# Allegro board pcb11.brd
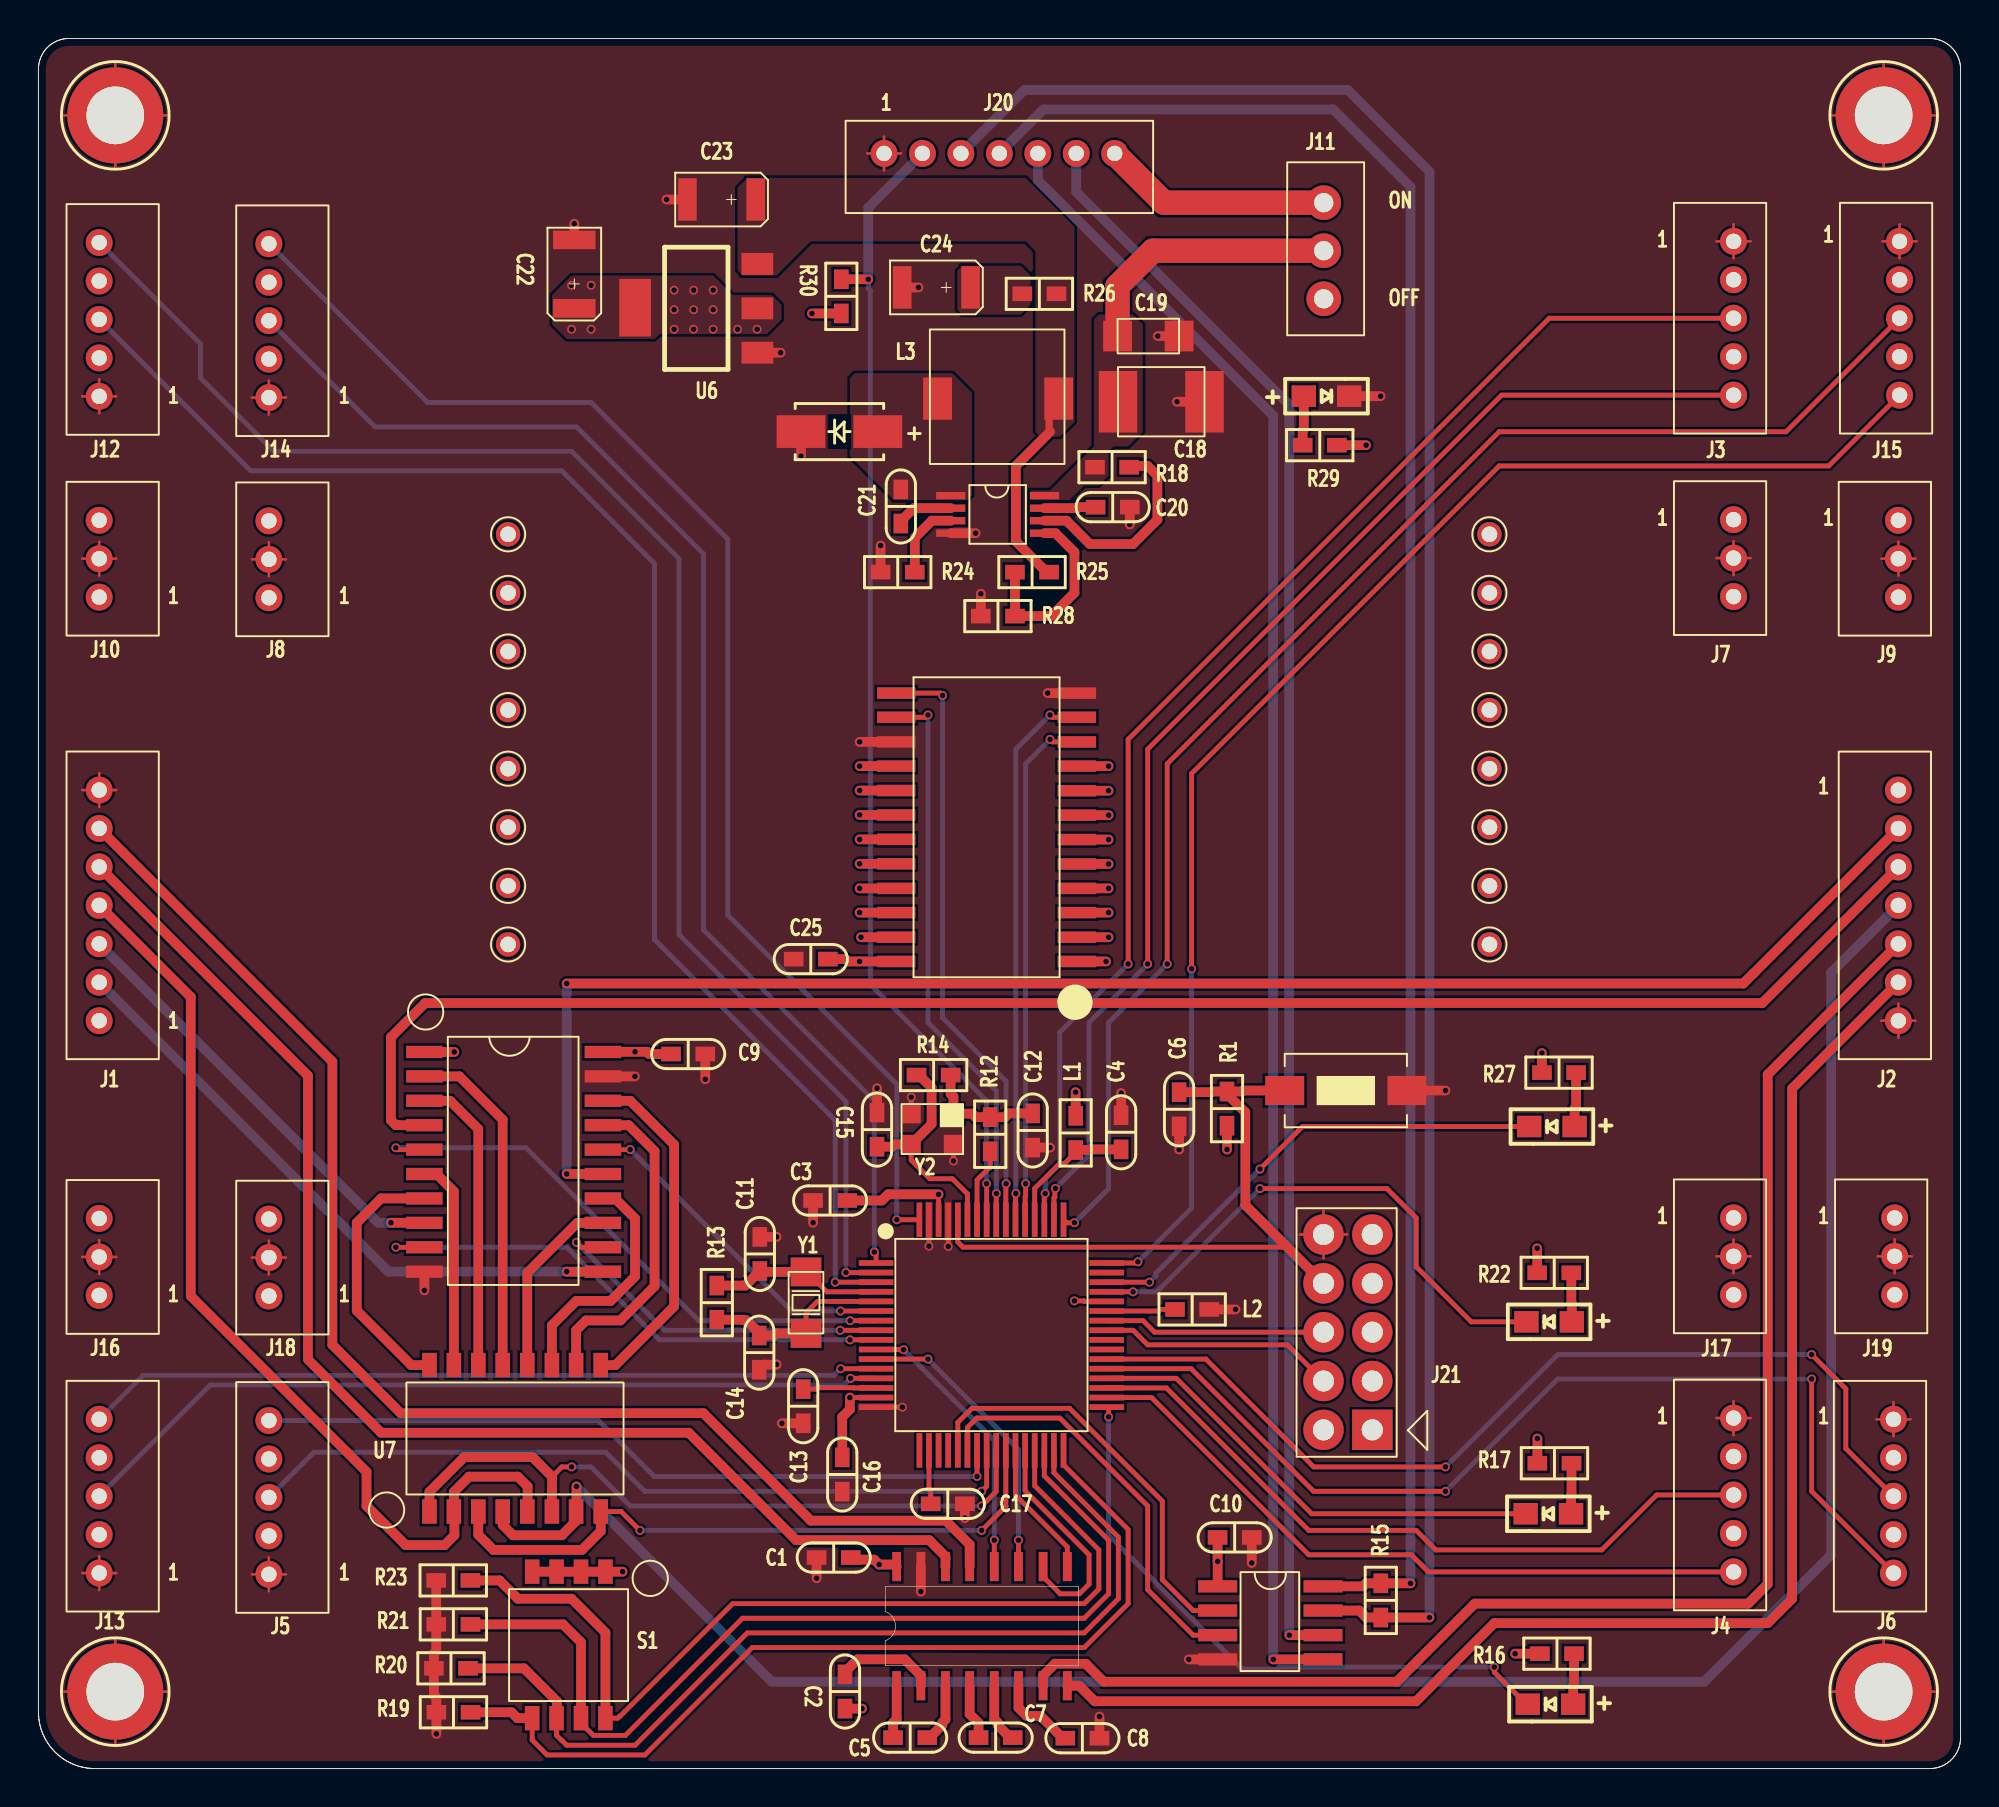
[diagram p0: board, top side]
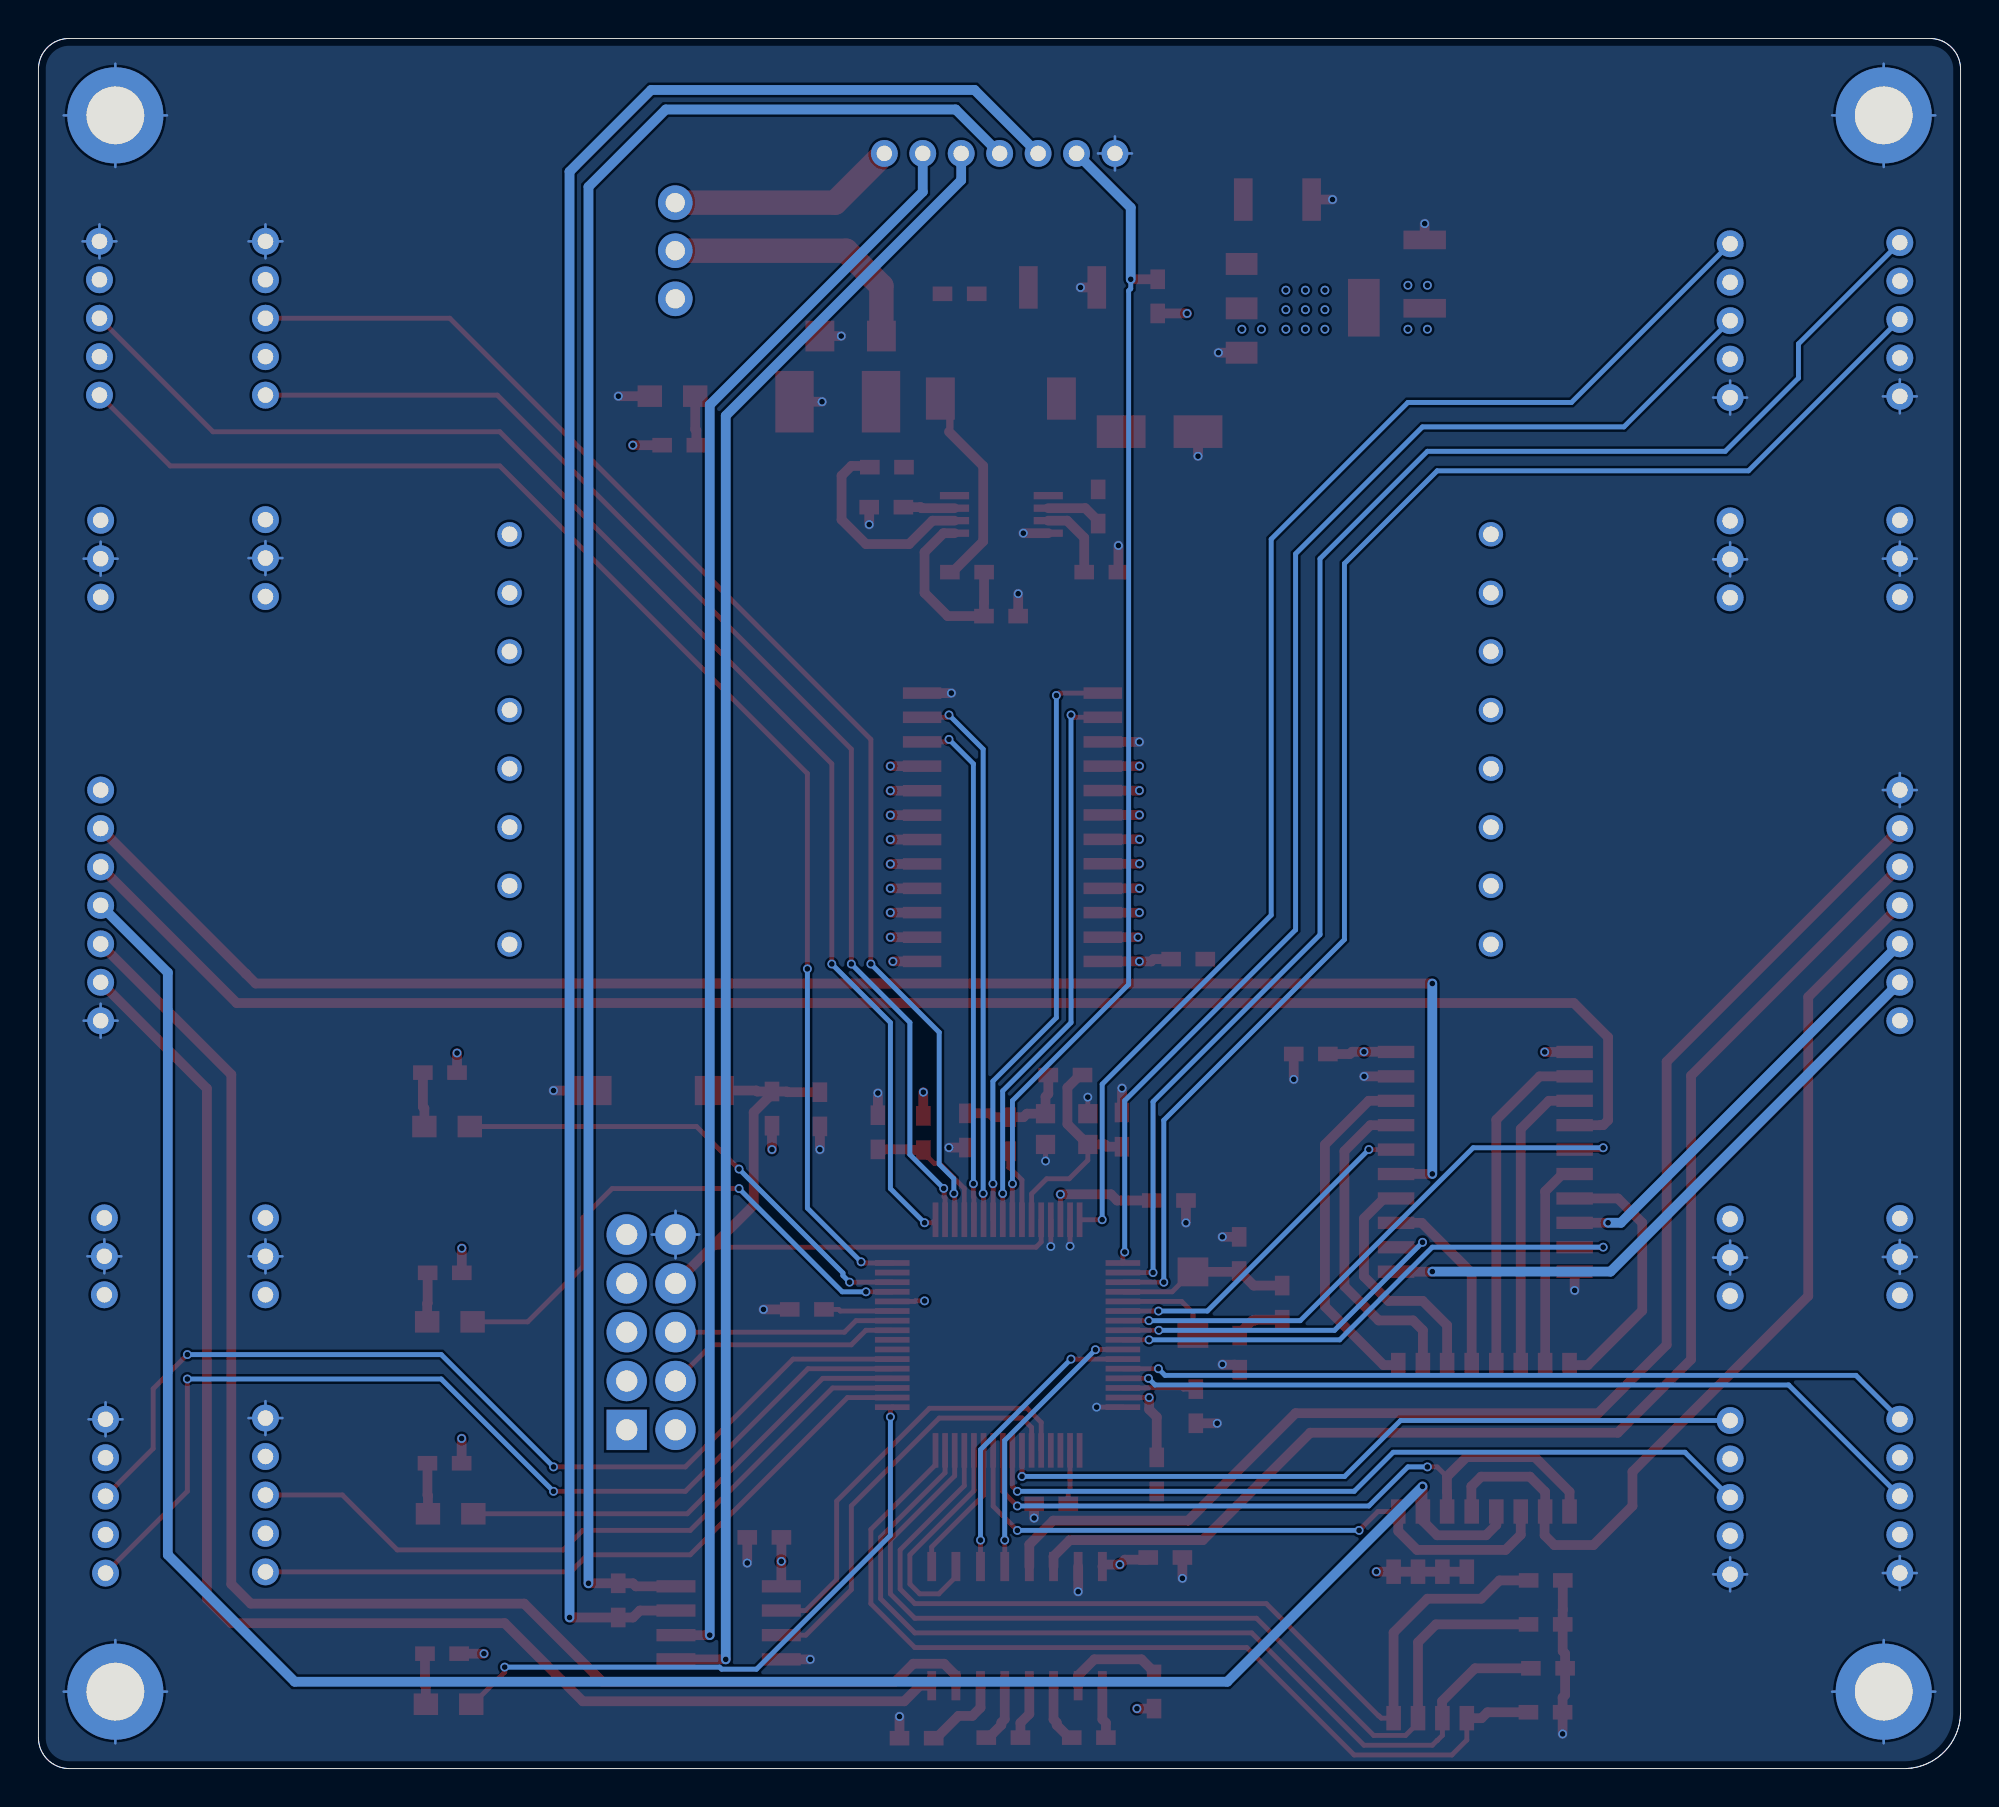
[diagram p1: board, bottom side, seen from below]

Outline 100 x 90 mm; copper layers: TOP, GND, PWR, BOTTOM. Coordinates in mm from the lower left corner of the outline.
Outline path: 0,88.4 arc(0.44,89.51) 1.53,90 ; 0,88.4 arc(0.44,89.51) 1.53,90 ; 0,88.4 0,2.88 ; 1.53,90 98.4,90 ; 0,2.88 arc(0.84,0.88) 2.82,0 ; 0,2.88 arc(0.84,0.88) 2.82,0 ; 98.4,90 arc(99.51,89.56) 100,88.47 ; 98.4,90 arc(99.51,89.56) 100,88.47 ; 2.82,0 98.43,0 ; 100,88.47 100,1.6 ; 98.43,0 arc(99.54,0.48) 100,1.6 ; 98.43,0 arc(99.54,0.48) 100,1.6

## Placement (name value [footprint] x y rotation side)
C1  0.1uF  [C0603]  41.37 10.98 180 top
C2  0.1uF  [C0603]  41.96 4.01 270 top
C3  0.1uF  [C0603]  41.19 29.55 0 top
C4  0.1uF  [C0603]  56.33 33.1 270 top
C5  0.1uF  [C0603]  45.35 1.61 0 top
C6  10uF  [C0603]  59.34 34.3 90 top
C7  0.1uF  [C0603]  49.8 1.61 0 top
C8  0.1uF  [C0603]  54.31 1.58 180 top
C9  0.1uF  [C0603]  33.8 37.17 0 top
C10  0.1uF  [C0603]  62.24 12.02 0 top
C11  20p  [C0603]  37.53 26.77 270 top
C12  20p  [C0603]  51.72 33.19 90 top
C13  1uF  [C0603]  39.79 18.85 90 top
C14  20p  [C0603]  37.5 21.64 90 top
C15  20p  [C0603]  43.63 33.24 270 top
C16  0.1uF  [C0603]  41.82 15.3 90 top
C17  1uF  [C0603]  47.31 13.77 180 top
C18  1uF/100V C4532X7R2A105M  [C4532]  56.16 71.1 0 top
C19  0.1uF/100V C3216X7R2A104KT  [C3216]  56.14 74.52 0 top
C20  0.1uF  [C0603]  55.89 65.62 0 top
C21  0.01uF  [C0603]  44.87 65.65 90 top
C22  47uF/6.3V  [C3528]  27.88 77.74 270 top
C23  10uF/16V  [C3528]  35.54 81.62 0 top
C24  10uF/16V  [C3528]  46.72 77.05 0 top
C25  0.1uF  [C0603]  40.18 42.11 180 top
D1  B260A  [SMA]  41.67 69.55 180 top
DS1  LED  [LED0805]  78.66 3.35 180 top
DS2  LED  [LED0805]  78.55 13.25 180 top
DS3  LED  [LED0805]  78.6 23.24 180 top
DS4  LED  [LED0805]  78.74 33.4 180 top
DS5  LED  [LED0805]  67.01 71.39 0 top
H4  MOUNT_HOLE  [HOLE197-118]  96 4 0 top
H5  MOUNT_HOLE  [HOLE197-118]  4 4 0 top
J1  CON7  [PH20_7]  3.16 38.9 90 top
J2  CON7  [PH20_7]  96.76 50.9 270 top
J3  CON7  [PH20_5]  88.19 79.45 270 top
J4  CON7  [PH20_5]  88.19 18.23 270 top
J5  CON7  [PH20_5]  11.99 10.1 90 top
J6  CON7  [PH20_5]  96.51 18.17 270 top
J7  CON3  [PH20_3]  88.19 64.97 270 top
J8  CON3  [PH20_3]  11.99 60.9 90 top
J9  CON3  [PH20_3]  96.76 64.94 270 top
J10  CON3  [PH20_3]  3.16 60.94 90 top
J11  SW  [SW-3]  66.87 81.46 270 top
J12  CON7  [PH20_5]  3.16 71.38 90 top
J13  CON7  [PH20_5]  3.16 10.17 90 top
J14  CON7  [PH20_5]  11.99 71.32 90 top
J15  CON7  [PH20_5]  96.82 79.45 270 top
J16  CON3  [PH20_3]  3.16 24.62 90 top
J17  CON3  [PH20_3]  88.19 28.65 270 top
J18  CON3  [PH20_3]  11.99 24.58 90 top
J19  CON3  [PH20_3]  96.57 28.65 270 top
J20  CON7  [PH20_7]  43.99 84.02 0 top
J21  CONN PCB 5x2-S  [10PIN]  66.86 17.62 0 top
L1  FERRITE BEAD  [L0603]  53.96 33.07 270 top
L2  FERRITE BEAD  [L0603]  60.02 23.88 0 top
L3  100uH(SLF7045T-101MR50-PF)  [L7X7]  46.78 71.26 0 top
R1  10K  [R0603]  61.84 34.33 270 top
R12  33  [R0603]  49.52 33 90 top
R13  10M  [R0603]  35.29 24.24 90 top
R14  1M  [R0603]  46.57 36.08 0 top
R15  120 NC  [R0603]  69.84 8.75 90 top
R16  1K  [R0603]  79 5.98 180 top
R17  1K  [R0603]  78.87 15.88 180 top
R18  200K  [R0603]  55.86 67.7 180 top
R19  1K  [R0603]  21.59 2.93 180 top
R20  1K  [R0603]  21.46 5.21 180 top
R21  1K  [R0603]  21.59 7.5 180 top
R22  1K  [R0603]  78.86 25.79 180 top
R23  1K  [R0603]  21.58 9.79 180 top
R24  100K  [R0603]  44.7 62.24 0 top
R25  1.62K  [R0603]  51.69 62.24 0 top
R26  1  [R0603]  52.08 76.72 0 top
R27  1K  [R0603]  79.11 36.2 180 top
R28  1K  [R0603]  49.92 59.95 0 top
R29  1K  [R0603]  66.66 68.84 0 top
R30  1K  [R0603]  41.77 76.58 270 top
REF DES1  MOUNT_HOLE  [HOLE197-118]  4 86 0 top
REF DES2  MOUNT_HOLE  [HOLE197-118]  96 86 0 top
S1  SW_DIP-4  [SW4]  31.42 6.43 0 top
SW1  PUSH BOTTOM  [KEY_SMD]  68.02 35.27 180 top
TP1  TP  [TP1]  75.49 58.11 0 top
TP2  TP  [TP1]  24.43 58.11 0 top
TP3  TP  [TP1]  75.49 55.06 0 top
TP4  TP  [TP1]  24.43 55.06 0 top
TP5  TP  [TP1]  24.43 52.01 0 top
TP6  TP  [TP1]  24.43 45.92 0 top
TP7  TP  [TP1]  75.49 45.92 0 top
TP8  TP  [TP1]  75.49 52.01 0 top
TP9  TP  [TP1]  75.49 64.21 0 top
TP10  TP  [TP1]  24.43 42.87 0 top
TP11  TP  [TP1]  75.49 42.87 0 top
TP12  TP  [TP1]  75.49 48.97 0 top
TP13  TP  [TP1]  24.43 64.21 0 top
TP14  TP  [TP1]  24.43 61.16 0 top
TP15  TP  [TP1]  24.43 48.97 0 top
TP16  TP  [TP1]  75.49 61.16 0 top
U1  MAX232AESE  [SO16]  49.09 7.41 90 top
U2  74HC245D  [SOIC20]  20.33 37.28 0 top
U3  NUC140RE3CN  [LQFP64]  49.58 22.55 0 top
U4  MAX490ESA  [SOIC8]  64.09 7.58 0 top
U5  LM5007MM  [MSOP-8]  47.46 66.22 0 top
U6  LM1117IMPX-5.0  [SOT_223_G]  34.22 75.96 90 top
U7  SWICH8  [SW8]  26.07 17.18 0 top
U8  CD74HCT4067M  [SO24]  49.33 48.97 180 top
Y1  32.768KHz  [Y3215]  39.93 25.84 270 top
Y2  12MHz  [CRYSTAL3225]  47.6 34.07 180 top

## Library data of the parts
C1 C2 C5 C7-C10 C18-C25 = CAP NP
C3 C4 C6 C11-C17 = CAP-C_0
D1 = ZHCS750/SOT_0
DS1-DS5 = LED-0603-LTST-C190GKT_1: Tolerance: #TOL; User Part Number: HAMP
H4 H5 REF DES1 REF DES2 = MOUNT_HOLE
J1 J2 J20 = CON7
J3-J6 J12-J15 = CON5_3
J7-J10 J16-J19 = CON3
J11 = CON3_0
J21 = CONN PCB 5x2-S
L1 L2 = INDUCTOR_0
L3 = INDUCTOR
R1 R12-R17 R19-R23 R27 R29 R30 = R_0
R18 R24-R26 R28 = R
S1 = SW_DIP4_0
SW1 = SW PUSHBUTTON
TP1-TP16 = TP
U1 = MAX232I/SO
U2 = 74HCT245_2: User Part Number: ***; Tolerance: ***
U3 = NCU120_LQFP_1
U4 = MAX490ESA: Tolerance: ***; User Part Number: ***
U5 = DD_0
U6 = LM1117_0
U7 = SWICH8
U8 = CD74HCT4067M
Y1 = CRYSTAL
Y2 = Crystal/SMD

## Footprints (pads in the part's own frame, mm; a bottom-side part is the same pattern mirrored in y, then rotated)
10PIN
  rect 2.101x2.101 hole 1.1: 1(2.54,0)
  round 2.101 hole 1.1: 2(0,0) 3(2.54,2.54) 4(0,2.54) 5(2.54,5.08) 6(0,5.08) 7(2.54,7.62) 8(0,7.62) 9(2.54,10.16) 10(0,10.16)
C0603
  rect 1.021x0.759 smd: 1(-0.889,0) 2(0.889,0)
C3216
  rect 1.501x1.6 smd: 1(0,0) 2(3.2,0)
C3528
  rect 0.97x2.21 smd: 1(1.778,0) 2(-1.778,0)
C4532
  rect 1.999x3.2 smd: 1(0,0) 2(4.501,0)
CRYSTAL3225
  rect 1.001x1.001 smd: 1(0,0) 2(2.2,0) 3(2.2,1.6) 4(0,1.6)
HOLE197-118
  round 5.001 hole 3: 1(0,0)
KEY_SMD
  rect 2.029x1.519 smd: 1(-3.18,0) 2(3.18,0)
L7X7
  rect 1.501x2.2 smd: 1(0,0) 2(6.299,0)
L0603
  rect 1.021x0.759 smd: 1(-0.889,0) 2(0.889,0)
LED0805
  rect 1.27x1.12 smd: 1(-1.181,0) 2(1.181,0)
LQFP64
  rect 1.801x0.3 smd: 1(-5.999,3.749) 2(-5.999,3.251) 3(-5.999,2.751) 4(-5.999,2.25) 5(-5.999,1.75) 6(-5.999,1.25) 7(-5.999,0.749) 8(-5.999,0.249) 9(-5.999,-0.249) 10(-5.999,-0.749) 11(-5.999,-1.25) 12(-5.999,-1.75) 13(-5.999,-2.25) 14(-5.999,-2.751) 15(-5.999,-3.251) 16(-5.999,-3.749) 33(5.999,-3.749) 34(5.999,-3.251) 35(5.999,-2.751) 36(5.999,-2.25) 37(5.999,-1.75) 38(5.999,-1.25) 39(5.999,-0.749) 40(5.999,-0.249) 41(5.999,0.249) 42(5.999,0.749) 43(5.999,1.25) 44(5.999,1.75) 45(5.999,2.25) 46(5.999,2.751) 47(5.999,3.251) 48(5.999,3.749)
  rect 0.3x1.801 smd: 17(-3.749,-5.999) 18(-3.251,-5.999) 19(-2.751,-5.999) 20(-2.25,-5.999) 21(-1.75,-5.999) 22(-1.25,-5.999) 23(-0.749,-5.999) 24(-0.249,-5.999) 25(0.249,-5.999) 26(0.749,-5.999) 27(1.25,-5.999) 28(1.75,-5.999) 29(2.25,-5.999) 30(2.751,-5.999) 31(3.251,-5.999) 32(3.749,-5.999) 49(3.749,5.999) 50(3.251,5.999) 51(2.751,5.999) 52(2.25,5.999) 53(1.75,5.999) 54(1.25,5.999) 55(0.749,5.999) 56(0.249,5.999) 57(-0.249,5.999) 58(-0.749,5.999) 59(-1.25,5.999) 60(-1.75,5.999) 61(-2.25,5.999) 62(-2.751,5.999) 63(-3.251,5.999) 64(-3.749,5.999)
MSOP-8
  rect 1.519x0.381 smd: 1(0,0) 2(0,-0.65) 3(0,-1.3) 4(0,-1.951) 5(4.879,-1.951) 6(4.879,-1.3) 7(4.879,-0.65) 8(4.879,0)
PH20_3
  round 1.4 hole 0.8: 1(0,0) 2(1.999,0) 3(4,0)
PH20_5
  round 1.4 hole 0.8: 1(0,0) 2(1.999,0) 3(4,0) 4(5.999,0) 5(8.001,0)
PH20_7
  round 1.4 hole 0.8: 1(0,0) 2(1.999,0) 3(4,0) 4(5.999,0) 5(8.001,0) 6(10,0) 7(11.999,0)
R0603
  rect 1.021x0.759 smd: 1(-0.889,0) 2(0.889,0)
SMA
  rect 2.54x1.699 smd: 1(1.999,0) 2(-1.999,0)
SO16
  rect 1.519x0.46 smd: 1(-3.099,4.44) 2(-3.099,3.18) 3(-3.099,1.9) 4(-3.099,0.64) 5(-3.099,-0.64) 6(-3.099,-1.9) 7(-3.099,-3.18) 8(-3.099,-4.44) 9(3.099,-4.44) 10(3.099,-3.18) 11(3.099,-1.9) 12(3.099,-0.64) 13(3.099,0.64) 14(3.099,1.9) 15(3.099,3.18) 16(3.099,4.44)
SO24
  rect 1.999x0.599 smd: 1(-4.699,6.98) 2(-4.699,5.72) 3(-4.699,4.44) 4(-4.699,3.18) 5(-4.699,1.91) 6(-4.699,0.64) 7(-4.699,-0.63) 8(-4.699,-1.9) 9(-4.699,-3.18) 10(-4.699,-4.44) 11(-4.699,-5.72) 12(-4.699,-6.98) 13(4.699,-6.98) 14(4.699,-5.72) 15(4.699,-4.44) 16(4.699,-3.18) 17(4.699,-1.91) 18(4.699,-0.64) 19(4.699,0.63) 20(4.699,1.9) 21(4.699,3.18) 22(4.699,4.44) 23(4.699,5.72) 24(4.699,6.98)
SOIC8
  rect 2.029x0.64 smd: 1(-2.741,1.9) 2(-2.741,0.64) 3(-2.741,-0.64) 4(-2.741,-1.9) 5(2.741,-1.9) 6(2.741,-0.64) 7(2.741,0.64) 8(2.741,1.9)
SOIC20
  rect 1.9x0.64 smd: 1(-0.249,0) 2(-0.249,-1.27) 3(-0.249,-2.54) 4(-0.249,-3.81) 5(-0.249,-5.08) 6(-0.249,-6.35) 7(-0.249,-7.62) 8(-0.249,-8.89) 9(-0.249,-10.16) 10(-0.249,-11.43) 11(9.04,-11.43) 12(9.04,-10.16) 13(9.04,-8.89) 14(9.04,-7.62) 15(9.04,-6.35) 16(9.04,-5.08) 17(9.04,-3.81) 18(9.04,-2.54) 19(9.04,-1.27) 20(9.04,0)
SOT_223_G
  rect 1.14x1.651 smd: 1(-2.309,-3.18) 2(0,-3.18) 3(2.309,-3.18)
  rect 3x1.651 smd: 4(0.03,3.18)
SW4
  rect 0.759x1.27 smd: 1(-5.73,-3.81) 2(-4.46,-3.81) 3(-3.19,-3.81) 4(-1.92,-3.81) 5(-1.92,3.81) 6(-3.19,3.81) 7(-4.46,3.81) 8(-5.73,3.81)
SW8
  rect 0.759x1.27 smd: 1(-5.73,-3.81) 2(-4.46,-3.81) 3(-3.19,-3.81) 4(-1.92,-3.81) 5(-0.64,-3.81) 6(0.64,-3.81) 7(1.9,-3.81) 8(3.18,-3.81) 9(3.18,3.81) 10(1.9,3.81) 11(0.64,3.81) 12(-0.64,3.81) 13(-1.92,3.81) 14(-3.19,3.81) 15(-4.46,3.81) 16(-5.73,3.81)
SW-3
  round 1.801 hole 1.001: 1(0,0) 2(2.499,0) 3(5.001,0)
TP1
  round 1.27 hole 0.813: 1(0,0)
Y3215
  rect 1.501x1.6 smd: 1(0,0) 2(3.2,0)

## Nets
DGND: C1.2 C3.1 C4.1 C6.1 C8.1 C9.2 C10.2 C11.1 C12.1 C13.1 C14.1 C15.1 C16.1 C17.1 C18.2 C19.2 C20.2 C22.2 C23.2 C24.2 C25.2 D1.1 DS5.2(CATHODE) H4.1 H5.1 J1.7 J2.7 J3.1 J4.1 J5.1 J6.1 J7.2 J8.2 J9.2 J10.2 J12.1 J13.1 J14.1 J15.1 J16.2 J17.2 J18.2 J19.2 J20.1 J21.10 L2.2 R19.2 R20.2 R21.2 R23.2 R24.1 R28.1 REF DES1.1 REF DES2.1 SW1.1 U1.15(GND) U2.10(GND) U2.19(O\E\) U3.16(VSS1) U3.61(VSS2) U3.63(PVSS) U4.4 U5.4(RTN) U6.1(GND/ADJ) U8.12(GND) U8.15(\\E) Y2.2 Y2.4
DVCC5: C1.1 C2.2 C3.2 C9.1 C10.1 C16.2 C22.1 C25.1 J1.1 J2.1 J3.2 J4.2 J5.2 J6.2 J7.3 J8.3 J9.3 J10.3 J12.2 J13.2 J14.2 J15.2 J16.3 J17.3 J18.3 J19.3 J21.2(6) L1.1 R1.2 R16.2 R17.2 R22.2 R27.2 R29.2 R30.2 S1.5(B4) S1.6(B3) S1.7(B2) S1.8(B1) U1.16(VCC) U2.1(DIR) U2.20(VCC) U3.15(VDD1) U3.62(VDD2) U4.1(VCC) U6.2(OUT1) U6.4(OUT2) U8.24(VCC)
ADC: U3.44(PA.0/ADC0) U8.1(COM)
ADC0: J7.1 TP1.1 U8.7(I2)
ADC1: J8.1 TP2.1 U8.18(I13)
ADC2: J9.1 TP3.1 U8.6(I3)
ADC3: J10.1 TP4.1 U8.19(I12)
ADC4: J16.1 TP5.1 U8.20(I11)
ADC5: J17.1 TP7.1 U8.3(I6)
ADC6: J18.1 TP6.1 U8.22(I9)
ADC7: J19.1 TP8.1 U8.5(I4)
AN0: J3.4 TP9.1 U8.9(I0)
AN1: J4.4 TP11.1 U8.2(I7)
AN2: J5.4 TP10.1 U8.23(I8)
AN3: J6.4 TP12.1 U8.4(I5)
AN4: J12.4 TP14.1 U8.17(I14)
AN5: J13.4 TP15.1 U8.21(I10)
AN6: J14.4 TP13.1 U8.16(I15)
AN7: J15.4 TP16.1 U8.8(I1)
D12MI: C15.2 R14.1 U3.59(XT1_IN) Y2.3
D12MO: R12.1 U3.58(XT1_OUT)
DAVDD: C4.2 L1.2 U3.52(AVDD)
DAVSS: L2.1 U3.43(AVSS)
DC6.5V: C23.1 L3.2 R25.2 R26.2 U6.3(IN)
DC48V: C18.1 C19.1 J11.2 R18.2 U5.8(VIN)
DOOR_SW: J20.2 R30.1 U3.57(T0EX/INT1/PB.15)
DX32I: C14.2 R13.1 U3.5(X32I) Y1.2
DX32O: C11.2 R13.2 U3.4(X32O) Y1.1
GPIO0: U2.9(A7) U3.9(I2C0SDA/PA.8)
GPIO0_EXT: J1.2 U2.11(B7)
GPIO1: U2.12(B6) U3.8(I2C0SCL/PA.9)
GPIO1_EXT: J1.3 U2.8(A6)
GPIO2: U3.25(PD.6/CANRX0) U7.1 U7.6
GPIO2_EXT: J1.4 U7.2 U7.5
GPIO3: U2.5(A3) U3.7(NWR/I2C1SDA/PA.10)
GPIO3_EXT: J2.2 U2.15(B3)
GPIO4: U2.16(B2) U3.6(NRD/I2C1SCL/PA.11)
GPIO4_EXT: J2.3 U2.4(A2)
GPIO5: U3.26(PD.7/CANTX0) U7.3 U7.8
GPIO5_EXT: J2.4 U7.4 U7.7
ICECLK: J21.6(8) U3.42(ICE_CK)
ICEDAT: J21.4(7) U3.41(ICE_DAT)
ICERST: C6.2 J21.8(9) R1.1 SW1.2 U3.60(/RESET)
LED1: DS1.2(CATHODE) U3.33(PC.11/MOSI10)
LED2: DS2.2(CATHODE) U3.36(PC.8/SPISS10)
LED3: DS3.2(CATHODE) U3.45(PA.1/ADC1/AD12)
LED4: DS4.2(CATHODE) U3.46(PA.2/ADC2/AD11)
PW0: J3.5 U3.50(AD7/ADC6/PA.6)
PW1: J4.5 U3.34(PC.10/MISO10)
PW2: J5.5 U3.23(PB.2/RTS0/NWRL/T2EX)
PW3: J6.5 U3.37(PA.15/PWM3/I2SMCLK)
PW4: J12.5 U3.2(AD1/CPO1/PB.13)
PW5: J13.5 U3.12(ALE/RTS1/PB.6)
PW6: J14.5 U3.64(STADC/TM0/PB.8)
PW7: J15.5 U3.48(PA.4/ADC4/AD9)
RX0: J3.3 U3.51(AD6/ADC7PA.7)
RX1: J4.3 U3.35(PC.9/SPICLK1)
RX2: J5.3 U3.24(PB.3/CTS0/NWRH/T3EX)
RX3: J6.3 U3.38(PA.14/PWM2/AD15)
RX4: J12.3 U3.3(AD0/CLKO/CPO0/PB.12)
RX5: J13.3 U3.13(NCS/CTS1/PB.7)
RX6: J14.3 U3.1(SPISS31/INT0/PB.14)
RX7: J15.3 U3.49(AD8/ADC5/PA.5)
RXD0_485+: J20.4 R15.2 U4.8(A)
RXD0_485-: J20.3 R15.1 U4.7(B)
RXD0_TTL: U3.21(PB.0/RXD0) U4.2(RO)
RXD1_232: J1.6 U1.13(R1IN)
RXD1_TTL: U1.12(R\1\O\U\T\) U3.10(RXD1/PB.4)
RXD2_232: J2.6 U1.8(R2IN)
RXD2_TTL: U1.9(R\2\O\U\T\) U3.27(PD.14/RXD2)
S0: U3.53(AD5/CPN0/PC.7) U8.10(S0)
S1: U3.54(AD4/CPP0/PC.6) U8.11(S1)
S2: U3.56(AD2/CPP1/PC.14) U8.14(S2)
S3: U3.55(AD3/CPN1/PC.15) U8.13(S3)
SW1: R23.1 S1.4(A4) U3.29(PC.3/MOSI00/I2SDO)
SW2: R21.1 S1.3(A3) U3.30(PC.2/MISO00/I2SDI)
SW3: R20.1 S1.2(A2) U3.31(PC.1/SPICLK0/I2SBCLK)
SW4: R19.1 S1.1(A1) U3.32(PC.0/SPISS00/I2SLRCLK)
TXD0_485+: J20.5 U4.5(Y)
TXD0_485-: J20.6 U4.6(Z)
TXD0_TTL: U3.22(PB.1/TXD0) U4.3(DI)
TXD1_232: J1.5 U1.14(T\1\O\U\T\)
TXD1_TTL: U1.11(T1IN) U3.11(TXD1/PB.5)
TXD2_232: J2.5 U1.7(T\2\O\U\T\)
TXD2_TTL: U1.10(T2IN) U3.28(PD.15/TXD2)
N16792821: C12.2 R12.2 R14.2 Y2.1
N16829506: DS1.1(ANODE) R16.1
N16842654: C13.2 U3.14(LDO)
N16842979: C17.2 U3.18(VDD33)
N16844783: C2.1 U1.2(V+)
N16847896: DS2.1(ANODE) R17.1
N16848060: DS3.1(ANODE) R22.1
N16848148: DS4.1(ANODE) R27.1
N16848238: DS5.1(ANODE) R29.1
N16853994: J11.1 J20.7
N16858260: R18.1 U5.6(RON)
N16858566: R24.2 U5.3(RCL)
N16858684: C21.2 D1.2 L3.1 U5.1(SW)
N16859031: R25.1 R28.2 U5.5(FB)
N16859274: C21.1 U5.2(BST)
N16859316: C20.1 U5.7(VCC)
N16859558: C24.1 R26.1
N16868564: U2.7(A5) U7.16
N16868580: U2.6(A4) U7.15
N16868614: U2.13(B5) U7.12
N16868615: U2.14(B4) U7.11
N16869701: U2.3(A1) U7.14
N16869711: U2.2(A0) U7.13
N16869796: U2.18(B0) U7.9
N16869798: U2.17(B1) U7.10
N168447690: C5.1 U1.1(C1+)
N168447691: C5.2 U1.3(C1-)
N168447692: C7.1 U1.4(C2+)
N168447693: C7.2 U1.5(C2-)
N168447697: C8.2 U1.6(V-)

Pads without a net: J11 3; J21 1 3 5 7 9; U3 17 19 20 39 40 47

## Via types
v1: diameter 0.46, hole 0.3, TOP to BOTTOM, 150 vias

## Routing (per net, layer and track width the routed paths; a pad name or vN(x,y) marks a point on that pad's centre or on a via; arc(x,y) is an arc through that point)
DGND: length 389.9
  TOP w0.13: 88.19,25.76 J17.2 ; J17.2 88.19,27.53 ; J17.2 89.07,26.65 ; J17.2 87.3,26.65 ; 3.16,50.02 J1.7 ; J1.7 3.16,51.79 ; J1.7 4.04,50.9 ; J1.7 2.28,50.9 ; 11.99,9.22 J5.1 ; J5.1 12.87,10.1 ; J5.1 11.99,10.99 ; J5.1 11.1,10.1 ; 43.11,84.02 J20.1 ; J20.1 44.88,84.02 ; J20.1 43.99,84.9 ; J20.1 43.99,83.13 ; 3.16,9.29 J13.1 ; J13.1 2.28,10.17 ; J13.1 4.04,10.17 ; J13.1 3.16,11.05 ; J2.7 96.76,39.79 ; J2.7 97.65,38.9 ; J2.7 95.88,38.9 ; J2.7 96.76,38.02 ; 95.88,62.94 J9.2 ; J9.2 96.76,63.82 ; J9.2 96.76,62.05 ; J9.2 97.65,62.94 ; 11.99,70.43 J14.1 ; J14.1 12.87,71.32 ; J14.1 11.1,71.32 ; J14.1 11.99,72.2 ; 11.99,25.7 J18.2 ; J18.2 12.87,26.58 ; J18.2 11.1,26.58 ; J18.2 11.99,27.47 ; 1.31,4 H5.1 ; H5.1 6.68,4 ; H5.1 4,1.32 ; H5.1 4,6.69 ; J7.2 88.19,63.85 ; J7.2 88.19,62.09 ; J7.2 89.07,62.97 ; J7.2 87.3,62.97 ; 88.19,17.35 J4.1 ; J4.1 87.3,18.23 ; J4.1 89.07,18.23 ; J4.1 88.19,19.12 ; J10.2 3.16,63.82 ; J10.2 3.16,62.05 ; J10.2 2.28,62.94 ; J10.2 4.04,62.94 ; J6.1 96.51,19.05 ; J6.1 95.63,18.17 ; J6.1 96.51,17.28 ; J6.1 97.39,18.17 ; J8.2 11.99,63.79 ; J8.2 12.87,62.9 ; J8.2 11.1,62.9 ; J8.2 11.99,62.02 ; 95.94,79.45 J15.1 ; J15.1 96.82,80.33 ; J15.1 97.71,79.45 ; J15.1 96.82,78.56 ; 93.31,86 REF DES2.1 ; REF DES2.1 98.68,86 ; REF DES2.1 96,83.31 ; REF DES2.1 96,88.68 ; 66.86,26.55 J21.10 ; J21.10 68.09,27.78 ; J21.10 65.62,27.78 ; J21.10 66.86,29.01 ; 2.28,71.38 J12.1 ; J12.1 3.16,72.27 ; J12.1 3.16,70.5 ; J12.1 4.04,71.38 ; REF DES1.1 4,88.68 ; REF DES1.1 6.68,86 ; REF DES1.1 4,83.31 ; REF DES1.1 1.31,86 ; J3.1 88.19,80.33 ; J3.1 88.19,78.56 ; J3.1 87.3,79.45 ; J3.1 89.07,79.45 ; H4.1 98.68,4 ; H4.1 96,6.69 ; H4.1 96,1.32 ; H4.1 93.31,4 ; J16.2 3.16,27.5 ; J16.2 2.28,26.61 ; J16.2 3.16,25.73 ; J16.2 4.04,26.61 ; 95.69,26.65 J19.2 ; J19.2 96.57,27.53 ; J19.2 97.45,26.65 ; J19.2 96.57,25.76
  TOP w0.254: U3.61 v1(47.33,27.16) ; U3.16 v1(44.95,18.8) ; U3.63 v1(46.33,27.17) ; Y2.2 v1(45.41,34.93) ; Y2.4 v1(47.6,31.61)
  TOP w0.508: U2.10 v1(20.08,24.87) ; DS5.2 v1(69.83,71.39) ; C20.2 v1(56.78,64.71) ; C6.1 v1(59.34,32.2) ; U4.4 v1(59.85,5.68) ; v1(38.4,21.03) 38.39,21.01 37.76,21.01 C14.1 ; C11.1 v1(38.4,27.66) ; C22.2 v1(27.88,80.37) ; U5.4 v1(48.76,64.26) ; D1.1 v1(39.67,68.27) ; C4.1 v1(56.33,35.14) ; C1.2 v1(40.49,9.9) ; C10.2 v1(63.12,10.69) ; U6.1 v1(38.61,73.65) ; SW1.1 v1(73.2,35.27) ; C12.1 v1(52.63,32.3) ; U2.19 v1(31.03,36.01) ; U8.15 v1(42.72,53.41) ; C13.1 v1(38.68,17.96) ; C8.1 v1(55.2,2.71) ; C24.2 v1(45.79,77.05) ; C23.2 v1(32.67,81.62) ; C17.1 v1(48.2,13.03) ; C3.1 v1(40.3,28.39) ; C15.1 v1(43.63,35.39) ; R24.1 v1(43.82,63.62) ; U1.15 v1(45.91,9.2) ; C19.2 v1(58.23,74.52) ; L2.2 v1(62.28,23.88) ; C9.2 v1(34.69,35.85) ; U8.12 v1(52.51,55.95) ; v1(20.7,1.8) R19.2 20.7,3.7 20.57,3.83 R20.2 20.57,5.98 20.7,6.11 R21.2 20.7,8.27 20.69,8.27 R23.2 ; R28.1 v1(49.03,61.11) ; C18.2 v1(59.23,71.1)
  GND w0.13: 96.57,25.76 J19.2 ; J19.2 95.69,26.65 ; J19.2 97.45,26.65 ; J19.2 96.57,27.53 ; 3.16,25.73 J16.2 ; J16.2 3.16,27.5 ; J16.2 4.04,26.61 ; J16.2 2.28,26.61 ; REF DES1.1 6.06,86 ; REF DES1.1 4,88.06 ; REF DES1.1 1.94,86 ; REF DES1.1 4,83.94 ; 88.19,62.09 J7.2 ; J7.2 88.19,63.85 ; J7.2 87.3,62.97 ; J7.2 89.07,62.97 ; 11.1,62.9 J8.2 ; J8.2 11.99,63.79 ; J8.2 11.99,62.02 ; J8.2 12.87,62.9 ; 3.16,50.02 J1.7 ; J1.7 2.28,50.9 ; J1.7 3.16,51.79 ; J1.7 4.04,50.9 ; 11.1,10.1 J5.1 ; J5.1 11.99,10.99 ; J5.1 11.99,9.22 ; J5.1 12.87,10.1 ; 88.19,25.76 J17.2 ; J17.2 87.3,26.65 ; J17.2 89.07,26.65 ; J17.2 88.19,27.53 ; 93.94,86 REF DES2.1 ; REF DES2.1 98.06,86 ; REF DES2.1 96,83.94 ; REF DES2.1 96,88.06 ; 3.16,62.05 J10.2 ; J10.2 3.16,63.82 ; J10.2 4.04,62.94 ; J10.2 2.28,62.94 ; 87.3,79.45 J3.1 ; J3.1 88.19,80.33 ; J3.1 88.19,78.56 ; J3.1 89.07,79.45 ; H4.1 98.06,4 ; H4.1 96,1.94 ; H4.1 96,6.06 ; H4.1 93.94,4 ; 4,1.94 H5.1 ; H5.1 4,6.06 ; H5.1 1.94,4 ; H5.1 6.06,4 ; J20.1 43.99,84.9 ; J20.1 43.99,83.13 ; J20.1 44.88,84.02 ; J20.1 43.11,84.02 ; J4.1 88.19,19.12 ; J4.1 88.19,17.35 ; J4.1 89.07,18.23 ; J4.1 87.3,18.23 ; J9.2 96.76,63.82 ; J9.2 95.88,62.94 ; J9.2 96.76,62.05 ; J9.2 97.65,62.94 ; 95.94,79.45 J15.1 ; J15.1 96.82,78.56 ; J15.1 96.82,80.33 ; J15.1 97.71,79.45 ; J12.1 4.04,71.38 ; J12.1 3.16,72.27 ; J12.1 3.16,70.5 ; J12.1 2.28,71.38 ; J13.1 3.16,11.05 ; J13.1 3.16,9.29 ; J13.1 2.28,10.17 ; J13.1 4.04,10.17 ; 66.86,26.55 J21.10 ; J21.10 66.86,29.01 ; J21.10 65.62,27.78 ; J21.10 68.09,27.78 ; J14.1 11.99,72.2 ; J14.1 11.1,71.32 ; J14.1 12.87,71.32 ; J14.1 11.99,70.43 ; J18.2 12.87,26.58 ; J18.2 11.1,26.58 ; J18.2 11.99,27.47 ; J18.2 11.99,25.7 ; 95.63,18.17 J6.1 ; J6.1 97.39,18.17 ; J6.1 96.51,19.05 ; J6.1 96.51,17.28 ; J2.7 97.65,38.9 ; J2.7 96.76,39.79 ; J2.7 96.76,38.02 ; J2.7 95.88,38.9
  BOTTOM w0.13: J10.2 4.04,62.94 ; J10.2 3.16,63.82 ; J10.2 2.28,62.94 ; J10.2 3.16,62.05 ; J14.1 12.87,71.32 ; J14.1 11.99,72.2 ; J14.1 11.99,70.43 ; J14.1 11.1,71.32 ; J1.7 3.16,51.79 ; J1.7 2.28,50.9 ; J1.7 3.16,50.02 ; J1.7 4.04,50.9 ; J6.1 96.51,19.05 ; J6.1 97.39,18.17 ; J6.1 95.63,18.17 ; J6.1 96.51,17.28 ; J17.2 89.07,26.65 ; J17.2 87.3,26.65 ; J17.2 88.19,27.53 ; J17.2 88.19,25.76 ; J3.1 88.19,80.33 ; J3.1 88.19,78.56 ; J3.1 89.07,79.45 ; J3.1 87.3,79.45 ; 93.31,86 REF DES2.1 ; REF DES2.1 96,88.68 ; REF DES2.1 96,83.31 ; REF DES2.1 98.68,86 ; J15.1 96.82,80.33 ; J15.1 97.71,79.45 ; J15.1 96.82,78.56 ; J15.1 95.94,79.45 ; J5.1 11.99,10.99 ; J5.1 11.1,10.1 ; J5.1 12.87,10.1 ; J5.1 11.99,9.22 ; 2.28,71.38 J12.1 ; J12.1 4.04,71.38 ; J12.1 3.16,70.5 ; J12.1 3.16,72.27 ; REF DES1.1 6.68,86 ; REF DES1.1 4,83.31 ; REF DES1.1 1.31,86 ; REF DES1.1 4,88.68 ; 95.88,62.94 J9.2 ; J9.2 97.65,62.94 ; J9.2 96.76,62.05 ; J9.2 96.76,63.82 ; J19.2 97.45,26.65 ; J19.2 96.57,27.53 ; J19.2 96.57,25.76 ; J19.2 95.69,26.65 ; J16.2 3.16,27.5 ; J16.2 3.16,25.73 ; J16.2 2.28,26.61 ; J16.2 4.04,26.61 ; J20.1 43.99,84.9 ; J20.1 44.88,84.02 ; J20.1 43.11,84.02 ; J20.1 43.99,83.13 ; 2.28,10.17 J13.1 ; J13.1 4.04,10.17 ; J13.1 3.16,11.05 ; J13.1 3.16,9.29 ; 95.88,38.9 J2.7 ; J2.7 96.76,39.79 ; J2.7 96.76,38.02 ; J2.7 97.65,38.9 ; J8.2 11.99,63.79 ; J8.2 11.99,62.02 ; J8.2 12.87,62.9 ; J8.2 11.1,62.9 ; 11.1,26.58 J18.2 ; J18.2 12.87,26.58 ; J18.2 11.99,25.7 ; J18.2 11.99,27.47 ; 1.31,4 H5.1 ; H5.1 4,6.69 ; H5.1 4,1.32 ; H5.1 6.68,4 ; 96,1.32 H4.1 ; H4.1 96,6.69 ; H4.1 93.31,4 ; H4.1 98.68,4 ; J4.1 88.19,19.12 ; J4.1 88.19,17.35 ; J4.1 89.07,18.23 ; J4.1 87.3,18.23 ; 88.19,62.09 J7.2 ; J7.2 88.19,63.85 ; J7.2 89.07,62.97 ; J7.2 87.3,62.97 ; 66.86,26.55 J21.10 ; J21.10 68.09,27.78 ; J21.10 66.86,29.01 ; J21.10 65.62,27.78
DVCC5: length 109.3
  TOP w0.254: U3.62 v1(46.83,29.87) ; U3.15 v1(42.21,19.3)
  TOP w0.508: C3.2 43.88,29.55 44.2,29.87 v1(46.83,29.87) ; R16.2 v1(76.82,5.98) ; U2.1 v1(21.64,37.28) ; U1.16 44.54,10.61 v1(43.74,10.61) 43.48,10.87 42.37,10.87 C1.1 ; C9.1 31.77,37.17 31.65,37.29 v1(31.04,37.29) 29.38,37.29 U2.20 ; R27.2 v1(78.22,37.22) ; S1.8 S1.7 S1.6 S1.5 v1(30.39,10.24) ; v1(42.21,19.3) 42.21,18.68 41.82,18.29 C16.2 ; R17.2 v1(77.98,17.17) ; C25.1 41.99,42.11 42.11,41.99 v1(42.72,41.99) U8.24 ; R30.2 v1(40.24,75.69) ; U4.1 v1(61.35,10.78) 61.35,10.78 C10.1 ; R29.2 v1(69.08,68.84) ; 41.96,3.12 v1(42.85,3.12) ; R22.2 v1(77.97,27.07) ; R1.2 v1(61.84,32.2) ; L1.1 v1(53.96,35.19)
  PWR w0.13: J18.3 11.99,29.47 ; J18.3 11.99,27.7 ; J18.3 11.1,28.58 ; J18.3 12.87,28.58 ; J6.2 97.39,16.17 ; J6.2 96.51,17.05 ; J6.2 96.51,15.29 ; J6.2 95.63,16.17 ; 2.28,64.94 J10.3 ; J10.3 4.04,64.94 ; J10.3 3.16,64.05 ; J10.3 3.16,65.82 ; 88.19,23.76 J17.3 ; J17.3 88.19,25.53 ; J17.3 87.3,24.65 ; J17.3 89.07,24.65 ; J19.3 97.45,24.65 ; J19.3 96.57,23.76 ; J19.3 96.57,25.53 ; J19.3 95.69,24.65 ; J4.2 89.07,16.23 ; J4.2 87.3,16.23 ; J4.2 88.19,15.35 ; J4.2 88.19,17.12 ; J21.2 66.86,18.85 ; J21.2 65.62,17.62 ; J21.2 68.09,17.62 ; J21.2 66.86,16.39 ; J9.3 97.65,60.93 ; J9.3 96.76,60.05 ; J9.3 95.88,60.93 ; J9.3 96.76,61.82 ; J12.2 3.16,74.26 ; J12.2 4.04,73.38 ; J12.2 2.28,73.38 ; J12.2 3.16,72.5 ; J15.2 97.71,77.45 ; J15.2 96.82,76.56 ; J15.2 95.94,77.45 ; J15.2 96.82,78.33 ; J3.2 89.07,77.45 ; J3.2 87.3,77.45 ; J3.2 88.19,76.56 ; J3.2 88.19,78.33 ; J8.3 11.99,65.79 ; J8.3 12.87,64.9 ; J8.3 11.1,64.9 ; J8.3 11.99,64.02 ; J13.2 3.16,13.05 ; J13.2 3.16,11.29 ; J13.2 2.28,12.17 ; J13.2 4.04,12.17 ; 96.76,50.02 J2.1 ; J2.1 97.65,50.9 ; J2.1 96.76,51.79 ; J2.1 95.88,50.9 ; J14.2 12.87,73.32 ; J14.2 11.1,73.32 ; J14.2 11.99,74.2 ; J14.2 11.99,72.43 ; J5.2 12.87,12.1 ; J5.2 11.1,12.1 ; J5.2 11.99,11.22 ; J5.2 11.99,12.99 ; J16.3 4.04,28.62 ; J16.3 3.16,29.5 ; J16.3 2.28,28.62 ; J16.3 3.16,27.73 ; J1.1 4.04,38.9 ; J1.1 3.16,38.02 ; J1.1 2.28,38.9 ; J1.1 3.16,39.79 ; 88.19,60.08 J7.3 ; J7.3 88.19,61.85 ; J7.3 87.3,60.97 ; J7.3 89.07,60.97
  vias: v1(27.74,77.16) v1(27.74,74.87) v1(28.75,77.16) v1(28.75,74.87) v1(33.07,76.91) v1(33.07,75.89) v1(33.07,74.87) v1(34.09,76.91) v1(34.09,75.89) v1(34.09,74.87) v1(35.1,76.91) v1(35.1,75.89) v1(35.1,74.87) v1(36.37,74.87) v1(37.39,74.87)
ADC: length 21.6
  TOP w0.254: v1(53.9,24.33) 54.39,24.33 54.41,24.3 U3.44
  TOP w0.508: U8.1 v1(55.54,41.99)
  GND w0.508: v1(53.9,24.33) 55.54,25.97 v1(55.54,41.99)
ADC0: length 40.5
  TOP w0.508: v1(55.68,49.6) U8.7
  GND w0.508: v1(55.68,49.6) 57.58,49.6 66.09,58.11 TP1.1 82.35,64.97 J7.1
ADC1: length 37.3
  TOP w0.508: U8.18 v1(42.72,49.61)
  GND w0.508: v1(42.72,49.61) 40.56,49.61 32.05,58.11 TP2.1 14.78,58.11 J8.1
ADC2: length 49.6
  TOP w0.508: v1(55.68,48.33) U8.6
  GND w0.508: v1(55.68,48.33) 58.85,48.33 65.58,55.06 TP3.1 86.89,55.06 J9.1
ADC3: length 46.7
  TOP w0.508: U8.19 v1(42.72,48.34)
  GND w0.508: v1(42.72,48.34) 39.54,48.34 32.82,55.06 TP4.1 9.03,55.06 J10.1
ADC4: length 64.4
  TOP w0.508: U8.20 v1(42.72,47.07)
  GND w0.508: v1(42.72,47.07) 38.53,47.07 33.58,52.01 TP5.1 14.27,52.01 7.16,44.9 7.16,28.62 J16.1
ADC5: length 48.3
  TOP w0.508: v1(55.68,44.53) U8.3
  GND w0.508: v1(55.68,44.53) 64.06,44.53 65.45,45.92 TP7.1 81.84,45.92 85.14,42.62 85.14,31.69 J17.1
ADC6: length 50.1
  TOP w0.508: v1(42.72,44.53) U8.22
  GND w0.508: v1(42.72,44.53) 35.73,44.53 34.34,45.92 TP6.1 19.61,45.92 14.02,40.33 14.02,26.61 J18.1
ADC7: length 59.5
  TOP w0.508: v1(55.68,47.06) U8.5
  GND w0.508: v1(55.68,47.06) 60.62,47.06 65.58,52.01 TP8.1 82.09,52.01 91.74,42.36 91.74,33.47 J19.1
AN0: length 43
  TOP w0.508: v1(55.68,52.15) U8.9
  GND w0.508: J3.4 84.73,73.45 TP9.1 67.74,64.21 v1(55.68,52.15)
AN1: length 60.3
  TOP w0.508: v1(55.68,43.25) U8.2
  GND w0.508: v1(55.68,43.25) 60.89,43.25 61.26,42.87 TP11.1 80.31,42.87 82.6,40.58 82.6,17.82 J4.4
AN2: length 53.9
  TOP w0.508: U8.23 v1(42.79,43.25)
  GND w0.508: J5.4 16.56,20.68 16.56,37.79 21.64,42.87 TP10.1 41.8,42.87 42.18,43.25 v1(42.79,43.25)
AN3: length 72.2
  TOP w0.508: v1(55.68,45.79) U8.4
  GND w0.508: v1(55.68,45.79) 62.4,45.79 65.58,48.97 TP12.1 82.09,48.97 88.7,42.36 88.7,33.47 91.24,30.93 91.24,17.44 J6.4
AN4: length 53.8
  TOP w0.508: U8.17 v1(42.72,50.88)
  GND w0.508: v1(42.72,50.88) 41.57,50.88 31.29,61.16 TP14.1 17.32,68.27 9.96,68.27 7.42,70.81 7.42,73.12 J12.4
AN5: length 67.1
  TOP w0.508: U8.21 v1(42.72,45.79)
  GND w0.508: v1(42.72,45.79) 41.81,45.79 41.81,45.66 41.45,45.3 40.94,45.3 40.58,45.66 40.58,45.79 37.27,45.79 34.09,48.97 TP15.1 18.59,48.97 9.19,39.57 9.19,22.2 J13.4
AN6: length 47.5
  TOP w0.508: U8.16 v1(42.72,52.15)
  GND w0.508: J14.4 18.94,77.32 24.43,71.83 TP13.1 30.66,64.21 v1(42.72,52.15)
AN7: length 52.2
  TOP w0.508: v1(55.68,50.87) U8.8
  GND w0.508: J15.4 92.16,68.78 83.11,68.78 TP16.1 66.85,61.16 56.56,50.87 v1(55.68,50.87)
D12MI: length 12.1
  TOP w0.254: U3.59 48.33,29.9 47.55,30.68 46.37,30.68 45.41,31.65 Y2.3
  TOP w0.508: C15.2 44.4,32.35 44.52,32.47 Y2.3 46.47,33.53 46.47,35.42 45.81,36.08 R14.1
D12MO: length 3.9
  TOP w0.254: R12.1 49.52,31.28 49.49,31.28 48.83,30.62 U3.58
DAVDD: length 7
  TOP w0.254: U3.52 51.83,30.18 53.14,31.48 53.4,31.48 53.96,32.05 L1.2
  TOP w0.508: L1.2 54.73,32.18 54.76,32.21 C4.2
DAVSS: length 3.6
  TOP w0.254: L2.1 58.36,23.88 58.28,23.8 U3.43
DC6.5V: length 10.6
  TOP w0.381: L3.2 52.58,70.77 52.58,69.75
  TOP w0.508: 52.63,69.54 50.85,67.76 50.85,63.84 52.45,62.24 R25.2
DC48V: length 14.1
  TOP w1.27: C19.1 56.14,77.12 57.98,78.96 J11.2
DOOR_SW: length 60.6
  TOP w0.254: U3.57 49.33,30.42 v1(49.33,30.42)
  TOP w0.508: R30.1 v1(43.17,77.47)
  BOTTOM w0.254: v1(49.33,30.42) 49.33,34.74 43.28,40.79 43.28,76.88 43.17,76.98 v1(43.17,77.47)
  BOTTOM w0.508: J20.2 43.17,81.2 v1(43.17,77.47)
DX32I: length 10.1
  TOP w0.254: U3.5 40.53,24.3 39.93,23.71 Y1.2
  TOP w0.508: R13.1 36.68,23.35 36.72,23.31 36.85,23.31 37.5,22.66 C14.2 38.27,22.53 38.38,22.64 Y1.2
DX32O: length 9
  TOP w0.254: U3.4 41.02,24.8 39.98,25.84 Y1.1
  TOP w0.508: Y1.1 37.57,25.84 C11.2 36.78,25.13 R13.2
GPIO0: length 28.5
  TOP w0.254: U3.9 v1(42.22,22.3) ; v1(18.59,27.12) 18.6,27.12 U2.9
  BOTTOM w0.254: v1(18.59,27.12) 27.48,27.12 32.3,22.3 v1(42.22,22.3)
GPIO0_EXT: length 32.4
  TOP w0.508: v1(27.48,25.85) 27.49,25.85 U2.11
  BOTTOM w0.508: v1(27.48,25.85) 18.21,25.85 J1.2
GPIO1: length 19
  TOP w0.254: U3.8 v1(41.71,22.8) ; U2.12 28.25,27.12 v1(27.99,27.38)
  BOTTOM w0.254: v1(27.99,27.38) 32.57,22.8 v1(41.71,22.8)
GPIO1_EXT: length 22.9
  TOP w0.508: U2.8 20.07,28.39 v1(18.34,28.39)
  BOTTOM w0.508: v1(18.34,28.39) 17.67,28.39 J1.3
GPIO2: length 37
  TOP w0.254: U3.25 49.83,14.42 v1(49.07,13.66) ; 26.72,15.18 27.23,15.69 v1(27.74,15.69)
  TOP w0.508: U7.1 20.34,14.39 22.15,16.2 25.7,16.2 26.72,15.18 26.72,14.4 26.71,14.39 U7.6
  BOTTOM w0.254: v1(27.74,15.69) 28.75,15.69 30.78,13.66 v1(49.07,13.66)
GPIO2_EXT: length 50.6
  TOP w0.508: J1.4 7.92,40.14 7.92,24.58 17.07,15.44 17.07,13.66 19.1,11.63 21.13,11.63 21.64,12.14 21.64,13.34 U7.2 21.61,14.39 22.41,15.18 24.94,15.18 25.45,14.68 25.45,13.39 U7.5
GPIO3: length 30.2
  TOP w0.254: v1(18.59,32.29) 18.69,32.2 U2.5 ; U3.7 v1(42.23,23.3)
  BOTTOM w0.254: v1(42.23,23.3) 34.35,23.3 25.36,32.29 v1(18.59,32.29)
GPIO3_EXT: length 84.4
  TOP w0.508: v1(27.48,40.84) 88.7,40.84 89.2,41.35 89.21,41.35 J2.2 ; U2.15 29.36,30.93 v1(27.48,30.93)
  BOTTOM w0.508: v1(27.48,40.84) v1(27.48,30.93)
GPIO4: length 17.7
  TOP w0.254: U3.6 v1(41.73,23.8) ; v1(30.78,32.2) 30.78,32.2 U2.16
  BOTTOM w0.254: v1(30.78,32.2) 39.19,23.8 v1(41.73,23.8)
GPIO4_EXT: length 88.3
  TOP w0.508: J2.3 89.68,39.82 20.12,39.82 18.34,38.04 18.34,33.73 18.59,33.47 18.74,33.47 18.74,33.47 U2.4
GPIO5: length 34.2
  TOP w0.254: v1(49.07,12.39) 50.33,13.65 U3.26 ; U7.8 30.31,13.37 v1(31.29,12.39)
  TOP w0.508: U7.3 22.88,12.16 23.67,11.37 28.28,11.37 29.25,12.35 U7.8
  BOTTOM w0.254: v1(31.29,12.39) v1(49.07,12.39)
GPIO5_EXT: length 114.3
  TOP w0.508: v1(27.99,14.68) 27.99,13.39 U7.7 27.97,12.88 27.23,12.14 24.69,12.14 24.15,12.67 U7.4
  BOTTOM w0.508: J2.4 93.27,41.41 93.27,11.12 86.66,4.52 38.15,4.52 v1(27.99,14.68)
ICECLK: length 11.5
  TOP w0.254: U3.42 57.47,23.3 58.07,22.7 J21.6
ICEDAT: length 12.4
  TOP w0.254: J21.4 64.97,22.04 57.71,22.04 56.95,22.8 U3.41
ICERST: length 35.9
  TOP w0.254: 64.84,27.26 64.7,27.12 48.1,27.12 47.83,27.39 U3.60
  TOP w0.508: R1.1 61.84,35.09 62.79,34.14 62.79,29.31 J21.8 ; R1.1 62.6,35.22 62.65,35.27 SW1.2 ; R1.1 61.07,35.22 61.03,35.18 C6.2
LED1: length 32.4
  TOP w0.254: v1(75.74,5.28) 75.74,5.01 77.41,3.35 DS1.2 ; U3.33 55.68,18.7 v1(55.68,18.29)
  BOTTOM w0.254: v1(75.74,5.28) 64.56,5.28 64.46,5.17 62.64,5.17 55.68,12.14 v1(55.68,18.29)
LED2: length 24.7
  TOP w0.254: U3.36 59.2,20.3 66.24,13.25 DS2.2
LED3: length 28.4
  TOP w0.254: DS3.2 74.55,23.24 71.68,26.11 71.68,28.65 70.15,30.17 v1(63.55,30.17) ; U3.45 v1(56.95,24.8)
  BOTTOM w0.254: v1(63.55,30.17) 58.18,24.8 v1(56.95,24.8)
LED4: length 25.4
  TOP w0.254: DS4.2 65.76,33.4 v1(63.55,31.19) ; U3.46 v1(57.8,25.3)
  BOTTOM w0.254: v1(57.8,25.3) 58.15,25.65 58.15,25.78 v1(63.55,31.19)
PW0: length 64.6
  TOP w0.254: U3.50 52.83,29.68 52.88,29.74 52.88,30.16 v1(52.9,30.18) ; v1(57.71,41.85) 57.71,53.03 76.12,71.45 J3.5
  BOTTOM w0.254: v1(52.9,30.18) 54.66,31.94 54.66,38.81 v1(57.71,41.85)
PW1: length 36.4
  TOP w0.254: U3.34 57.91,19.3 66.09,11.12 71.42,11.12 72.31,10.23 J4.5
PW2: length 39.4
  TOP w0.254: U3.23 v1(48.83,15.2)
  BOTTOM w0.254: v1(48.83,15.2) 32.04,15.2 29.13,18.11 J5.5
PW3: length 53.6
  TOP w0.254: v1(73.2,14.42) 66.34,14.42 59.97,20.8 U3.37 ; J6.5 92.25,14.42 v1(92.25,20.26)
  BOTTOM w0.254: v1(73.2,14.42) 79.04,20.26 v1(92.25,20.26)
PW4: length 80.3
  TOP w0.254: U3.2 v1(42.01,25.8)
  BOTTOM w0.254: J12.5 8.43,74.11 8.43,72.33 12.24,68.52 27.74,68.52 33.32,62.94 33.32,43.38 42.01,34.69 v1(42.01,25.8)
PW5: length 41.5
  TOP w0.254: U3.12 v1(41.73,20.8)
  BOTTOM w0.254: v1(41.73,20.8) 41.39,20.45 5.44,20.45 J13.5
PW6: length 70.5
  TOP w0.254: U3.64 v1(44.66,28.55)
  BOTTOM w0.254: J14.5 20.24,71.06 28.75,71.06 35.86,63.95 35.86,44.39 44.66,35.6 v1(44.66,28.55)
PW7: length 73.2
  TOP w0.254: U3.48 57.14,26.3 v1(57.2,26.36) ; v1(59.99,41.6) 59.99,51.76 76,67.76 93.14,67.76 J15.5
  BOTTOM w0.254: v1(57.2,26.36) 59.99,29.15 v1(59.99,41.6)
RX0: length 67.4
  TOP w0.254: U3.51 52.33,29.87 v1(52.37,29.92) ; v1(56.69,41.85) 56.69,53.54 78.6,75.45 J3.3
  BOTTOM w0.254: v1(56.69,41.85) 53.14,38.3 53.14,31.44 52.37,30.68 v1(52.37,29.92)
RX1: length 37.3
  TOP w0.254: J4.3 84.19,14.23 81.33,11.37 72.69,11.37 71.68,12.39 66.09,12.39 58.68,19.8 U3.35
RX2: length 41.1
  TOP w0.254: v1(49.07,14.42) 49.33,14.68 U3.24
  BOTTOM w0.254: v1(49.07,14.42) 31.55,14.42 29.51,16.45 14.34,16.45 J5.3
RX3: length 50.5
  TOP w0.254: J6.3 94.03,16.65 94.03,19.76 v1(92.25,21.53) ; v1(73.2,15.69) 66.34,15.69 60.74,21.3 U3.38
  BOTTOM w0.254: v1(92.25,21.53) 79.04,21.53 v1(73.2,15.69)
RX4: length 77.6
  TOP w0.254: U3.3 v1(41.45,25.3)
  BOTTOM w0.254: v1(41.45,25.3) 41.45,33.73 32.05,43.12 32.05,62.68 27.23,67.51 11.03,67.51 J12.3
RX5: length 43
  TOP w0.254: U3.13 v1(42.25,20.3)
  BOTTOM w0.254: J13.3 8.94,19.95 41.9,19.95 v1(42.25,20.3)
RX6: length 68.2
  TOP w0.254: U3.1 43.58,26.77 v1(43.48,26.87)
  BOTTOM w0.254: v1(43.48,26.87) 43.48,34.74 34.59,43.63 34.59,63.19 27.99,69.79 17.51,69.79 J14.3
RX7: length 74.2
  TOP w0.254: v1(58.72,41.85) 58.72,52.27 76,69.54 90.92,69.54 J15.3 ; U3.49 53.49,28.39 v1(53.9,28.39)
  BOTTOM w0.254: v1(53.9,28.39) 55.68,30.17 55.68,38.81 v1(58.72,41.85)
RXD0_485+: length 101.3
  TOP w0.508: U4.8 68.91,9.48 69.07,9.64 R15.2 v1(71.38,9.64)
  BOTTOM w0.508: J20.4 52.28,86.3 67.36,86.3 71.38,82.28 v1(71.38,9.64)
RXD0_485-: length 108.4
  TOP w0.508: v1(72.37,7.86) R15.1 69.07,7.86 68.71,8.22 U4.7
  BOTTOM w0.508: J20.3 51.3,87.32 68.12,87.32 72.37,83.07 v1(72.37,7.86)
RXD0_TTL: length 22
  TOP w0.254: U3.21 47.83,18.01 48.56,18.74 53.64,18.74 58.47,13.91 58.47,9.82 60.08,8.22 U4.2
RXD1_232: length 70.5
  TOP w0.508: U1.13 48.45,11.65 47.2,12.9 40.18,12.9 34.59,18.49 18.85,18.49 15.29,22.04 15.29,36.77 J1.6
RXD1_TTL: length 14.7
  TOP w0.254: v1(45.01,21.79) 44.75,21.79 44.74,21.8 U3.10 ; U1.12 v1(49.73,11.88)
  BOTTOM w0.254: v1(45.01,21.79) 49.73,17.07 v1(49.73,11.88)
RXD2_232: length 74.6
  TOP w0.508: J2.6 91.24,35.37 91.24,8.83 89.97,7.56 75.74,7.56 71.68,3.5 54.96,3.5 54.15,4.31 U1.8
RXD2_TTL: length 7.2
  TOP w0.254: U1.9 53.53,11.53 50.83,14.22 U3.27
S0: length 27
  TOP w0.254: U3.53 51.33,29.71 51.36,29.74 v1(51.36,30.42) ; v1(52.63,53.54) 52.76,53.41 U8.10
  BOTTOM w0.254: v1(51.36,30.42) 51.36,52.27 v1(52.63,53.54)
S1: length 28.5
  TOP w0.254: U3.54 50.83,29.9 v1(50.85,29.92) ; v1(52.63,54.81) 52.75,54.69 U8.11
  BOTTOM w0.254: v1(50.85,29.92) 50.85,53.03 v1(52.63,54.81)
S2: length 29.4
  TOP w0.254: U8.14 46.16,54.69 v1(46.28,54.81) ; U3.56 49.83,29.91 v1(49.83,29.92)
  BOTTOM w0.254: v1(49.83,29.92) 49.83,35.25 46.28,38.81 v1(46.28,54.81)
S3: length 31.1
  TOP w0.254: U3.55 50.33,30.41 v1(50.34,30.42) ; v1(47.04,55.82) 46.92,55.95 U8.13
  BOTTOM w0.254: v1(50.34,30.42) 50.34,35.76 47.04,39.06 v1(47.04,55.82)
SW1: length 49.6
  TOP w0.254: U3.29 51.83,14.71 55.17,11.37 55.17,9.34 54.41,8.58 36.12,8.58 30.28,2.74 30.25,2.74 30.14,2.62 S1.4
  TOP w0.508: S1.4 29.5,7.07 27.74,8.83 24.94,8.83 23.99,9.79 R23.1
SW2: length 50
  TOP w0.254: S1.3 28.23,2.37 28.87,1.72 30.53,1.72 36.63,7.82 54.41,7.82 55.68,9.09 55.68,11.88 52.33,15.23 U3.30
  TOP w0.508: R21.1 27.29,7.5 28.23,6.57 S1.3
SW3: length 48.8
  TOP w0.254: S1.2 26.96,1.73 27.22,1.47 27.23,1.47 27.48,1.21 31.04,1.21 36.88,7.06 54.41,7.06 56.18,8.83 56.18,12.04 52.83,15.39 U3.31
  TOP w0.508: R20.1 25.26,5.21 26.97,3.5 26.97,2.64 S1.2
SW4: length 48.4
  TOP w0.254: S1.1 25.69,1.49 26.47,0.71 31.55,0.71 37.13,6.29 54.41,6.29 56.69,8.58 56.69,12.44 53.33,15.8 U3.32
  TOP w0.508: R19.1 24.61,2.93 24.92,2.62 S1.1
TXD0_485+: length 86
  TOP w0.508: U4.5 v1(64.24,5.68)
  BOTTOM w0.508: v1(64.24,5.68) 64.24,70.37 51.99,82.62 J20.5
TXD0_485-: length 83.4
  TOP w0.508: U4.6 v1(65.07,6.94)
  BOTTOM w0.508: v1(65.07,6.94) 65.07,70.94 53.99,82.02 J20.6
TXD0_TTL: length 21.6
  TOP w0.254: U3.22 48.33,17.74 48.82,18.23 53.14,18.23 57.71,13.66 57.71,9.31 60.08,6.94 U4.3
TXD1_232: length 68.1
  TOP w0.508: U1.14 47.19,11.04 46.34,11.88 39.42,11.88 33.83,17.47 17.83,17.47 14.02,21.28 14.02,36.04 J1.5
TXD1_TTL: length 15.4
  TOP w0.254: U3.11 v1(46.28,21.3) ; v1(50.99,11.88) U1.11
  BOTTOM w0.254: v1(46.28,21.3) 50.99,16.59 v1(50.99,11.88)
TXD2_232: length 77.1
  TOP w0.508: J2.5 89.97,36.1 89.97,9.6 88.95,8.58 74.73,8.58 70.66,4.52 55.42,4.52 54.49,5.45 52.88,5.45 52.27,4.84 U1.7
TXD2_TTL: length 11.8
  TOP w0.254: U3.28 51.33,14.45 54.66,11.12 54.66,9.6 54.15,9.09 53.16,9.09 52.27,9.98 U1.10
N16792821: length 6.3
  TOP w0.508: C12.2 50.48,34.08 50.28,33.89 R12.2 48.75,33.89 48.57,34.07 Y2.1 47.6,34.95 47.46,35.1 R14.2
N16829506: length 2.6
  TOP w0.508: DS1.1 79.84,4.3 79.89,4.34 R16.1
N16842654: length 3.8
  TOP w0.254: C13.2 40.43,19.74 40.5,19.81 42.41,19.81 42.42,19.8 U3.14
N16842979: length 2.8
  TOP w0.254: C17.2 46.42,14.41 46.33,14.5 U3.18
N16844783: length 5.2
  TOP w0.508: U1.2 45.91,4.84 45.06,5.68 42.62,5.68 41.96,5.03 41.96,4.9
N16847896: length 2.6
  TOP w0.508: R17.1 79.76,14.23 79.74,14.2 DS2.1
N16848060: length 2.6
  TOP w0.508: DS3.1 79.78,24.19 79.75,24.21 R22.1
N16848148: length 2.8
  TOP w0.508: DS4.1 79.92,34.35 80,34.42 R27.1
N16848238: length 2.6
  TOP w0.508: R29.1 65.77,69.61 65.83,69.67 DS5.1
N16853994: length 11.9
  TOP w1.27: J11.1 58.55,81.46 J20.7
N16858260: length 10.9
  TOP w0.508: U5.6 53.49,64.91 54.7,63.7 56.95,63.7 58.22,64.97 58.22,67.25 57.71,67.76 56.81,67.76 R18.1
N16858566: length 4
  TOP w0.508: U5.3 46.48,64.91 45.59,64.03 R24.2
N16859031: length 10
  TOP w0.508: U5.5 52.91,64.26 53.9,63.28 53.9,61.16 52.69,59.95 R28.2 50.81,60.65 50.8,60.66 R25.1
N16859274: length 3
  TOP w0.508: C21.1 44.87,64.89 45.54,65.57 U5.2
N16859316: length 2.7
  TOP w0.508: U5.7 54.05,65.57 54.1,65.62 C20.1
N16868564: length 13.6
  TOP w0.508: U2.7 17.83,29.66 16.56,28.39 16.56,23.82 19.39,20.99 U7.16
N16868580: length 10.9
  TOP w0.508: U7.15 21.61,30.02 20.71,30.93 U2.6
N16868614: length 9.8
  TOP w0.508: U7.12 25.43,25.79 28.03,28.39 U2.13
N16868615: length 12.6
  TOP w0.508: U2.14 30,29.66 31.04,28.62 31.04,25.6 29.77,24.33 27.98,24.33 26.71,23.06 U7.11
N16869701: length 15.7
  TOP w0.508: U2.3 21.41,34.74 22.88,33.27 U7.14
N16869711: length 17.8
  TOP w0.508: U7.13 24.15,33.75 21.9,36.01 U2.2
N16869796: length 18.1
  TOP w0.508: U2.18 30.79,34.74 33.07,32.46 33.07,24.04 30.02,20.99 U7.9
N16869798: length 17.1
  TOP w0.508: U2.17 30.7,33.47 32.05,32.12 32.05,25.09 30.28,23.31 28.49,23.31 27.97,22.8 U7.10
N168447690: length 2.8
  TOP w0.508: C5.1 44.46,2.38 44.65,2.56 U1.1
N168447691: length 3.2
  TOP w0.508: U1.3 47.19,2.56 47.03,2.4 47.03,2.27 46.37,1.61 C5.2
N168447692: length 2.9
  TOP w0.508: U1.4 48.45,2.84 48.91,2.38 C7.1
N168447693: length 3.2
  TOP w0.508: C7.2 50.56,1.61 49.9,2.27 49.9,2.4 49.73,2.57 U1.5
N168447697: length 4.2
  TOP w0.508: U1.6 50.99,3.16 51.41,2.74 52.14,2.74 53.29,1.58 C8.2

## Copper pours and planes (outline as drawn; the poured copper is in the pictures)
DGND on TOP: 0.38,88.4 0.72,89.24 1.54,89.62 98.4,89.62 99.24,89.28 99.62,88.46 99.62,1.6 99.27,0.75 98.42,0.38 2.83,0.38 1.11,1.15 0.38,2.89 ; 9 cut-outs
DGND on BOTTOM: 0.38,88.4 0.72,89.24 1.54,89.62 98.4,89.62 99.24,89.28 99.62,88.46 99.62,1.6 99.27,0.75 98.42,0.38 2.83,0.38 1.11,1.15 0.38,2.89 ; 3 cut-outs
DGND on GND: 0.38,88.4 0.72,89.24 1.54,89.62 98.4,89.62 99.24,89.28 99.62,88.46 99.62,1.6 99.27,0.75 98.42,0.38 2.83,0.38 1.11,1.15 0.38,2.89
DVCC5 on TOP: 26.72,76.65 27.74,77.67 35.1,77.67 36.12,76.65 38.15,76.65 38.66,76.14 38.66,75.38 37.9,74.62 32.31,74.62 32.05,74.37 27.48,74.37 26.72,75.13
DVCC5 on PWR: 0.38,88.4 0.72,89.24 1.54,89.62 98.4,89.62 99.24,89.28 99.62,88.46 99.62,1.6 99.27,0.75 98.42,0.38 2.83,0.38 1.11,1.15 0.38,2.89
DC6.5V on TOP: 52.12,69.29 51.87,69.54 51.87,78.94 51.36,79.45 40.18,79.45 38.4,77.67 36.63,77.67 36.37,77.92 36.37,82.24 36.88,82.75 51.36,82.75 53.9,80.21 53.9,70.05 53.14,69.29
DC48V on TOP: 51.61,66.49 52.63,66.49 54.91,68.78 54.91,75.38 55.17,75.64 56.95,75.64 57.45,75.13 57.45,69.54 56.69,68.78 55.93,68.78 55.68,68.52 55.68,67.25 55.17,66.75 54.41,66.75 53.64,65.98 51.61,65.98
N16858684 on TOP: 42.47,72.59 47.55,72.59 48.56,71.57 48.56,66.24 48.31,65.98 44.5,65.98 42.21,68.27 42.21,72.33
N16859558 on TOP: 48.06,78.18 51.1,78.18 51.61,77.67 51.61,76.14 51.1,75.64 48.06,75.64 47.8,75.89 47.8,77.92

## Text on the board
Ref Des/Silkscreen Top: 1 | U6 | ON | OFF
